# EAGLE board MazeSolverPCB_v_0.2_ (EAGLE 7.5.0)
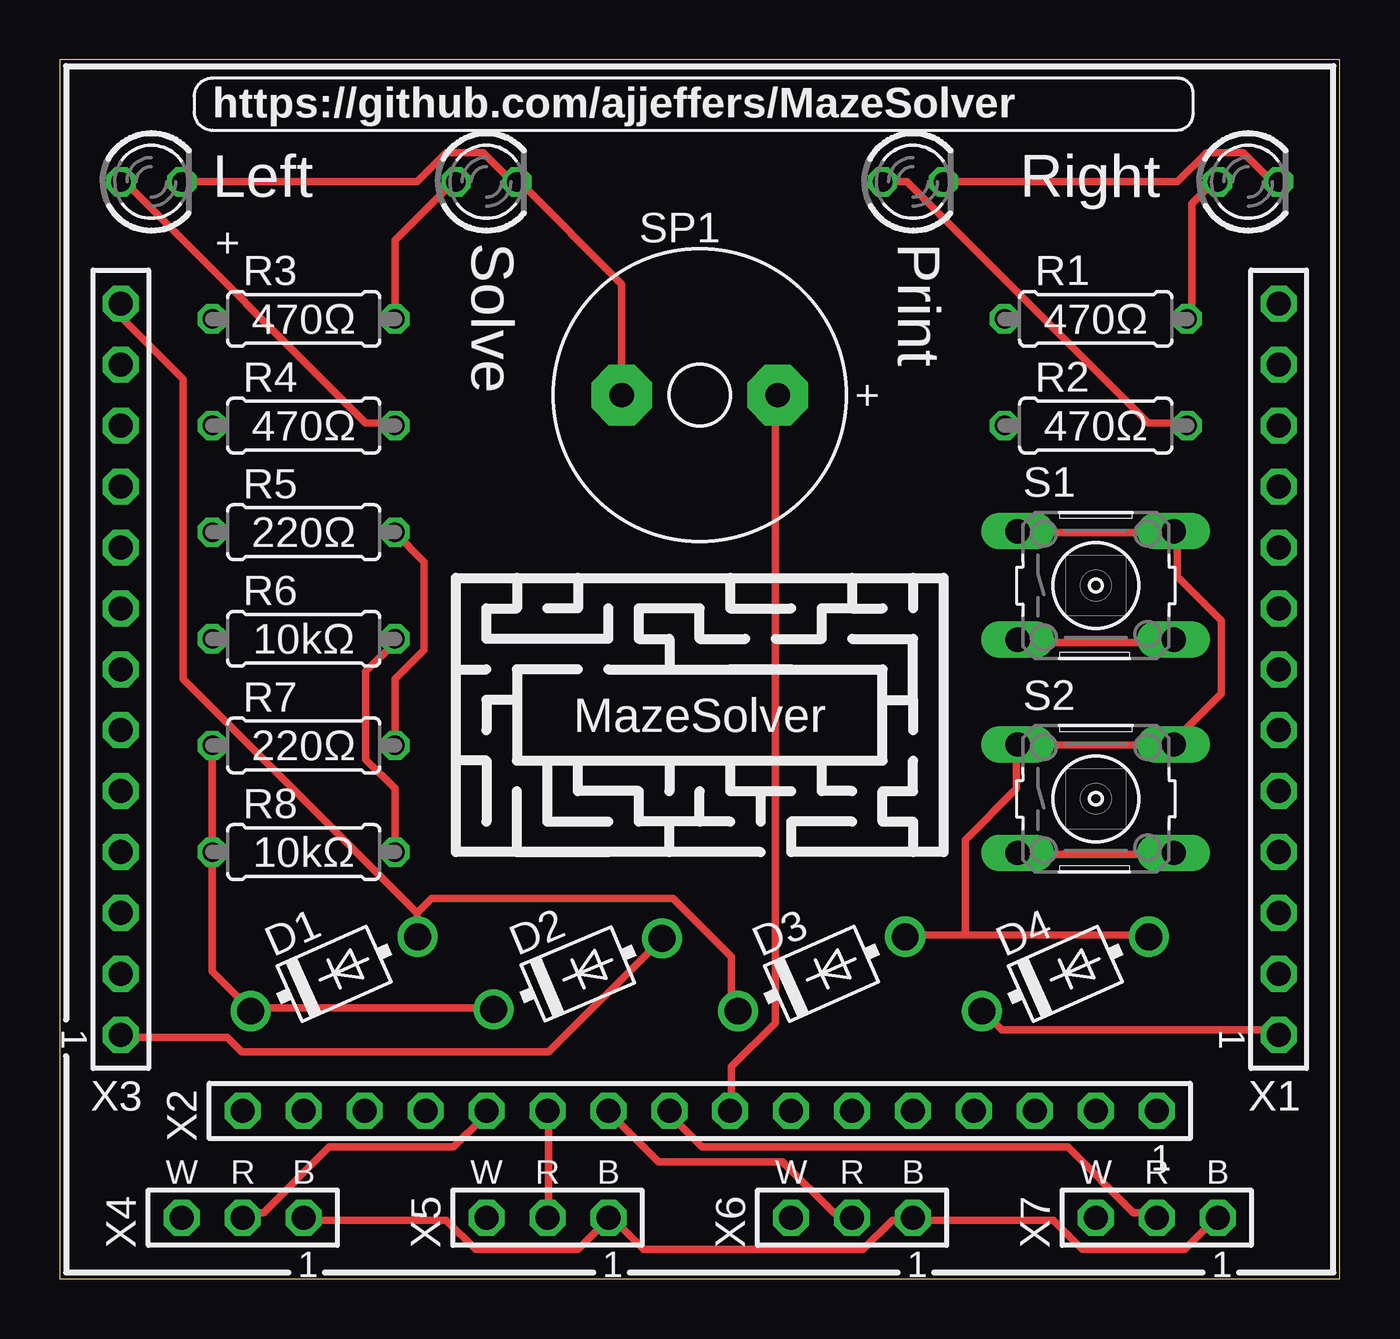
[diagram p0: board, top side]
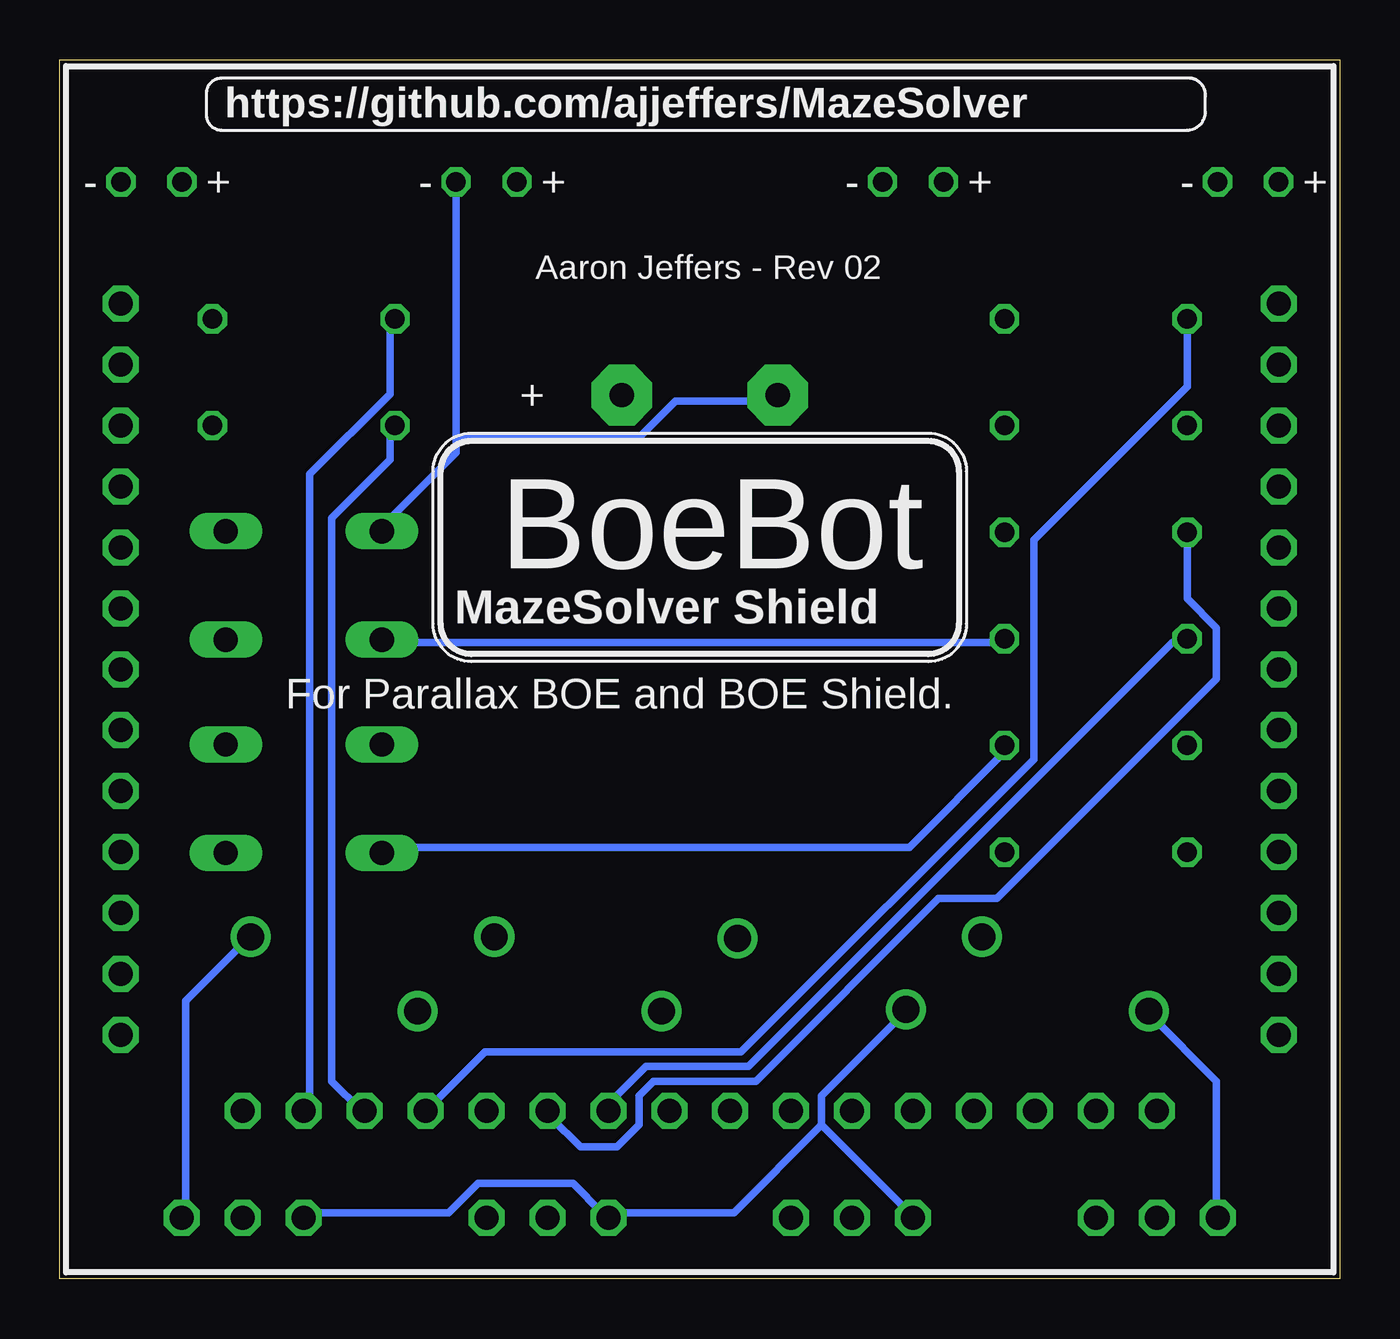
[diagram p1: board, bottom side, seen from below]

Size 53.34 x 50.8 mm. Coordinates in mm from the lower left corner, seen from the top.
Outline: 0,0 53.34,0 53.34,50.8 0,50.8 0,0
Copper layers (1*16): Top 0.0356mm / dielectric 1.5011mm / Bottom 0.0356mm
Design rules "LaenPCBOrder *": minimum track width 12mil, minimum drill 13mil, track to track 12mil, track to pad 12mil, pad to pad 12mil, via to via 12mil, smd to smd 6mil, copper to edge 15mil, drill to drill 6mil, minimum pad ring 7mil, minimum via ring 7mil, stop-mask expansion 3mil, vias tented up to drill 0mil, thermal gap 10mil

## Footprints (pad centres in the part's own frame; a part is rotated, then mirrored left to right if it is on the bottom)
DO41-10 = drill 1.118: A 3.81,0; C -3.81,0
LED3MM = drill 0.813 octagon: A -1.27,0; K 1.27,0
0207/7 = drill 0.813 octagon: 1 -3.81,0; 2 3.81,0
B3F-10XX = drill 1.016 long: 1 -3.251,2.261; 2 3.251,2.261; 3 -3.251,-2.261; 4 3.251,-2.261
AL60P = drill 1.016 pad 2.54 octagon: 1 -3.251,0; 2 3.251,0
TSW-113-02-S-S = drill 1 pad 1.5 octagon: 1 15.24,0; 2 12.7,0; 3 10.16,0; 4 7.62,0; 5 5.08,0; 6 2.54,0; 7 0,0; 8 -2.54,0; 9 -5.08,0; 10 -7.62,0; 11 -10.16,0; 12 -12.7,0; 13 -15.24,0
TSW-116-02-S-S = drill 1 pad 1.5 octagon: 1 19.05,0; 2 16.51,0; 3 13.97,0; 4 11.43,0; 5 8.89,0; 6 6.35,0; 7 3.81,0; 8 1.27,0; 9 -1.27,0; 10 -3.81,0; 11 -6.35,0; 12 -8.89,0; 13 -11.43,0; 14 -13.97,0; 15 -16.51,0; 16 -19.05,0
TSW-103-02-S-S = drill 1 pad 1.5 octagon: 1 2.54,0; 2 0,0; 3 -2.54,0

## Placement (x,y rotation side)
D1  [DO41-10]  11.43,12.7 24 top
D2  [DO41-10]  21.59,12.7 22.9 top
D3  [DO41-10]  31.75,12.7 24 top
D4  [DO41-10]  41.91,12.7 24 top
LED1  [LED3MM]  49.53,45.72 0 top
LED2  [LED3MM]  35.56,45.72 0 top
LED3  [LED3MM]  17.78,45.72 0 top
LED4  [LED3MM]  3.81,45.72 0 top
R1  [0207/7]  43.18,40.01 0 top
R2  [0207/7]  43.18,35.56 0 top
R3  [0207/7]  10.16,40.01 0 top
R4  [0207/7]  10.16,35.56 0 top
R5  [0207/7]  10.16,31.11 0 top
R6  [0207/7]  10.16,26.67 0 top
R7  [0207/7]  10.16,22.23 0 top
R8  [0207/7]  10.16,17.78 0 top
S1  [B3F-10XX]  43.18,28.89 0 top
S2  [B3F-10XX]  43.18,20 0 top
SP1  [AL60P]  26.67,36.83 0 top
X1  [TSW-113-02-S-S]  50.8,25.4 270 top
X2  [TSW-116-02-S-S]  26.67,6.99 0 top
X3  [TSW-113-02-S-S]  2.54,25.4 270 top
X4  [TSW-103-02-S-S]  7.62,2.54 0 top
X5  [TSW-103-02-S-S]  20.32,2.54 0 top
X6  [TSW-103-02-S-S]  33.02,2.54 0 top
X7  [TSW-103-02-S-S]  45.72,2.54 0 top

## Library data of the parts
D1-D4 = aaron
LED1-LED4 = led; MF: VISHAY SEMICONDUCTOR; OC_FARNELL: 1612435
R1-R8 = resistor
S1 S2 = aaron; MPN: B3F-1000; OC_FARNELL: 176432; OC_NEWARK: 36M3542
SP1 = buzzer; OC_FARNELL: unknown; OC_NEWARK: unknown
X1-X7 = con-samtec; OC_FARNELL: unknown; OC_NEWARK: unknown

## Nets
N$1: D3.A D4.A LED1.K LED2.K LED3.K LED4.K S1.1 S1.2 S2.1 S2.2 SP1.1 X4.1 X5.1 X6.1 X7.1
N$2: D1.C D2.C R7.1 R8.1 X4.3 X5.3 X6.3 X7.3
N$3: SP1.2 X2.8
N$4: X2.12 X4.2
N$5: LED1.A R1.2
N$6: X2.1
N$7: X2.11 X5.2
N$8: D4.C X1.1
N$9: R4.1
N$10: R1.1 X2.2
N$11: X2.10 X6.2
N$12: R5.2 R7.2 S2.3 S2.4
N$13: R6.2 R8.2 S1.3 S1.4
N$14: X2.9 X7.2
N$15: R2.1 X2.3
N$16: X2.16
N$18: X3.10
N$20: D1.A D3.C X3.13
N$21: R3.1 X2.4
N$22: X1.13
N$23: X3.11
N$24: D2.A X3.1
N$25: X2.5
N$26: R5.1 X2.6
N$27: R6.1 X2.7
N$28: LED4.A R4.2
N$29: LED3.A R3.2
N$30: LED2.A R2.2
N$31: X2.15

## Tracks (layer width: path | path; a pad name or v marks a point on that pad's centre or on a via)
N$1
  Top 0.305: LED4.K 14.88,45.72 16.1,46.94 17.63,46.94 18.85,45.72 LED3.K 19.15,45.72 23.42,41.45 SP1.1 | X4.1 10.31,2.44 16.1,2.44 17.32,1.22 21.59,1.22 22.81,2.44 X5.1 23.11,2.44 24.33,1.22 33.48,1.22 34.7,2.44 35.31,2.44 X6.1 35.61,2.44 41.4,2.44 42.62,1.22 46.89,1.22 48.11,2.44 X7.1 | LED2.K 46.58,45.72 47.8,46.94 49.33,46.94 50.55,45.72 LED1.K | S1.1 40.18,31.09 46.28,31.09 S1.2 46.58,31.09 46.58,29.26 48.41,27.43 48.41,24.38 46.58,22.55 S2.2 46.28,22.25 40.18,22.25 S2.1 39.88,22.25 39.88,20.42 37.74,18.29 37.74,14.33 | 37.74,14.33 45.36,14.33 D4.A | 37.74,14.33 35.31,14.33 D3.A
  Bottom 0.305: X7.1 48.11,2.74 48.11,11.58 45.67,14.02 D4.A | 36.83,35.05 36.83,34.44 39.88,31.39 S1.1 | 36.83,35.05 LED2.K | 36.83,35.05 29.21,35.05 27.69,36.58 23.42,36.58 SP1.1
N$2
  Top 0.305: R7.1 R8.1 6.35,12.8 7.87,11.28 D1.C 8.18,11.28 17.93,11.28 D2.C
  Bottom 0.305: X4.3 5.13,2.74 5.13,8.23 7.87,10.97 D1.C | 21.59,6.4 17.93,2.74 X5.3 | 21.59,6.4 21.59,7.62 18.24,10.97 D2.C | 21.59,6.4 25.25,2.74 30.43,2.74 X6.3 30.73,2.74 31.95,3.96 35.92,3.96 37.13,2.74 42.93,2.74 X7.3
N$3
  Top 0.305: X2.8 27.99,7.01 27.99,8.84 29.82,10.67 29.82,36.58 SP1.2
N$4
  Top 0.305: X4.2 7.87,2.74 8.48,2.74 11.23,5.49 16.41,5.49 17.63,6.71 X2.12
N$5
  Top 0.305: R1.2 47.19,40.23 47.19,44.81 48.11,45.72 LED1.A
N$7
  Top 0.305: X5.2 20.37,2.74 20.37,6.71 X2.11
N$8
  Top 0.305: X1.1 50.55,10.36 39.27,10.36 38.66,10.97 D4.C
N$10
  Bottom 0.305: R1.1 39.57,39.93 39.57,36.88 42.93,33.53 42.93,7.01 X2.2
N$11
  Top 0.305: X6.2 32.87,2.74 32.26,2.74 30.12,4.88 24.94,4.88 23.11,6.71 X2.10
N$12
  Top 0.305: S2.3 40.18,17.68 46.28,17.68 S2.4 | R7.2 13.97,24.99 15.19,26.21 15.19,29.87 13.97,31.09 R5.2
  Bottom 0.305: S2.3 39.88,17.98 17.93,17.98 13.97,21.95 R7.2
N$13
  Top 0.305: S1.3 40.18,26.52 46.28,26.52 S1.4 | R8.2 13.97,20.42 12.75,21.64 12.75,25.3 13.97,26.52 R6.2
  Bottom 0.305: S1.3 39.88,26.52 13.97,26.52 R6.2
N$14
  Top 0.305: X7.2 45.67,2.74 44.75,2.74 42.01,5.49 26.77,5.49 25.55,6.71 X2.9
N$15
  Bottom 0.305: R2.1 39.57,35.36 39.57,34.14 42.01,31.7 42.01,8.23 40.79,7.01 X2.3
N$20
  Top 0.305: 14.88,15.24 5.13,24.99 5.13,37.49 2.69,39.93 2.69,40.54 X3.13 | 14.88,15.24 14.88,14.33 D1.A | 14.88,15.24 15.49,15.85 25.55,15.85 27.99,13.41 27.99,11.28 D3.C
N$21
  Bottom 0.305: R3.1 6.35,37.19 12.75,30.79 12.75,21.64 24.94,9.45 35.61,9.45 38.05,7.01 X2.4
N$24
  Top 0.305: X3.1 2.69,10.06 6.96,10.06 7.57,9.45 20.37,9.45 24.94,14.02 D2.A
N$26
  Bottom 0.305: R5.1 6.35,28.35 5.13,27.13 5.13,24.99 14.28,15.85 16.71,15.85 24.33,8.23 28.6,8.23 29.21,7.62 29.21,6.4 30.12,5.49 31.65,5.49 32.87,6.71 X2.6
N$27
  Bottom 0.305: R6.1 6.35,26.52 6.96,26.52 24.64,8.84 28.91,8.84 30.73,7.01 X2.7
N$28
  Top 0.305: R4.2 13.97,35.66 12.75,35.66 2.69,45.72 LED4.A
N$29
  Top 0.305: R3.2 13.97,43.28 16.41,45.72 LED3.A
N$30
  Top 0.305: LED2.A 35.31,45.72 45.36,35.66 46.89,35.66 R2.2

## Text on the board
tPlace: https://github.com/ajjeffers/MazeSolver | Left | Right | + | Solve | Print | 470Ω | 470Ω | + | 470Ω | 470Ω | 220Ω | 10kΩ | MazeSolver | 220Ω | 10kΩ | W | R | B | W | R | B | W | R | B | W | R | B
bPlace: https://github.com/ajjeffers/MazeSolver | + | - | + | - | + | - | + | - | Aaron Jeffers - Rev 02 | + | BoeBot | MazeSolver Shield | For Parallax BOE and BOE Shield.